# Altium PCB ArmRev2.PcbDoc
Units mil, origin at the board's own origin, x right, y up, seen from the top; angles counter-clockwise.
Board outline 3210 x 2675 mil, 2 copper layers (Top Layer, Bottom Layer); 82 components, 52 nets, 280 pads, 92 vias.
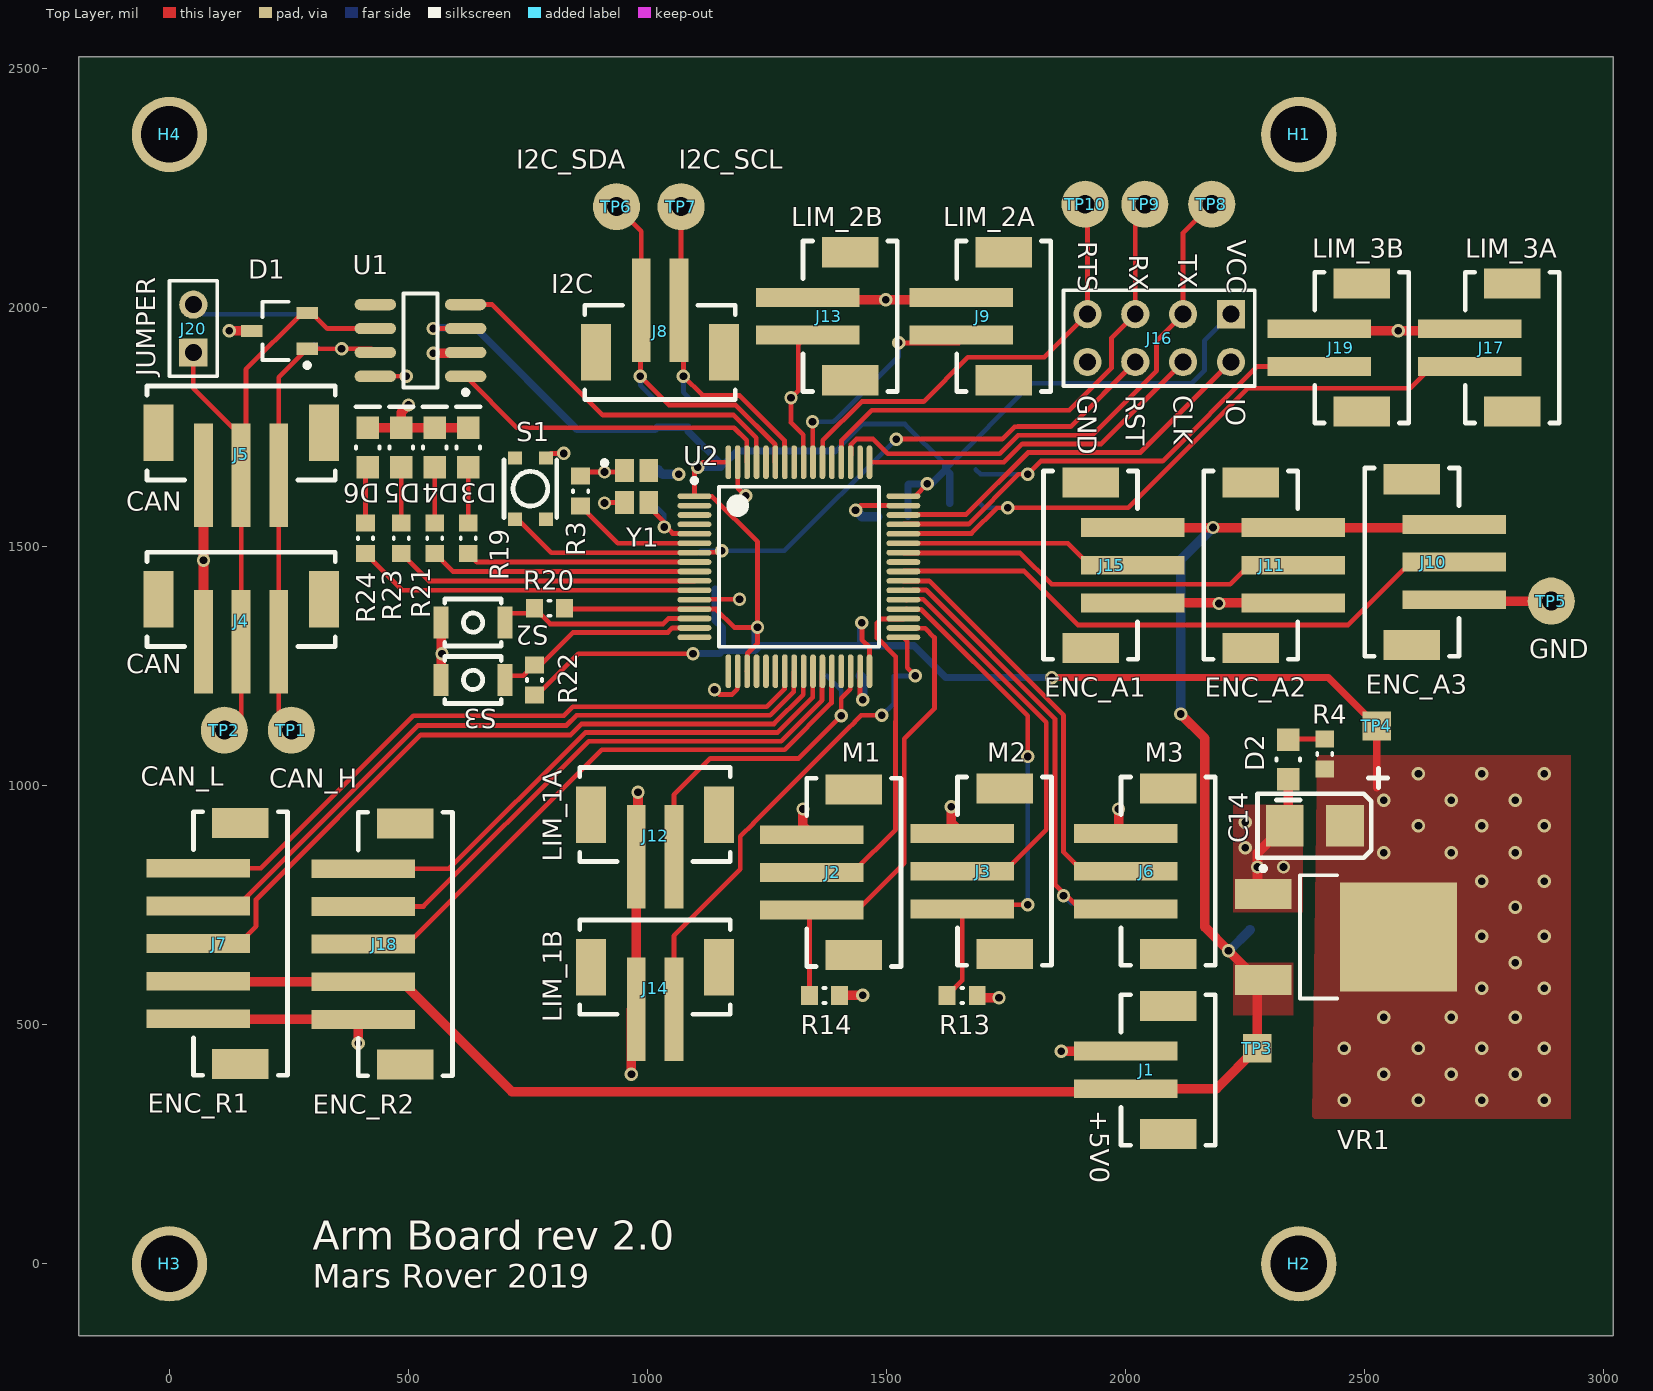
[diagram p0: Top Layer view]
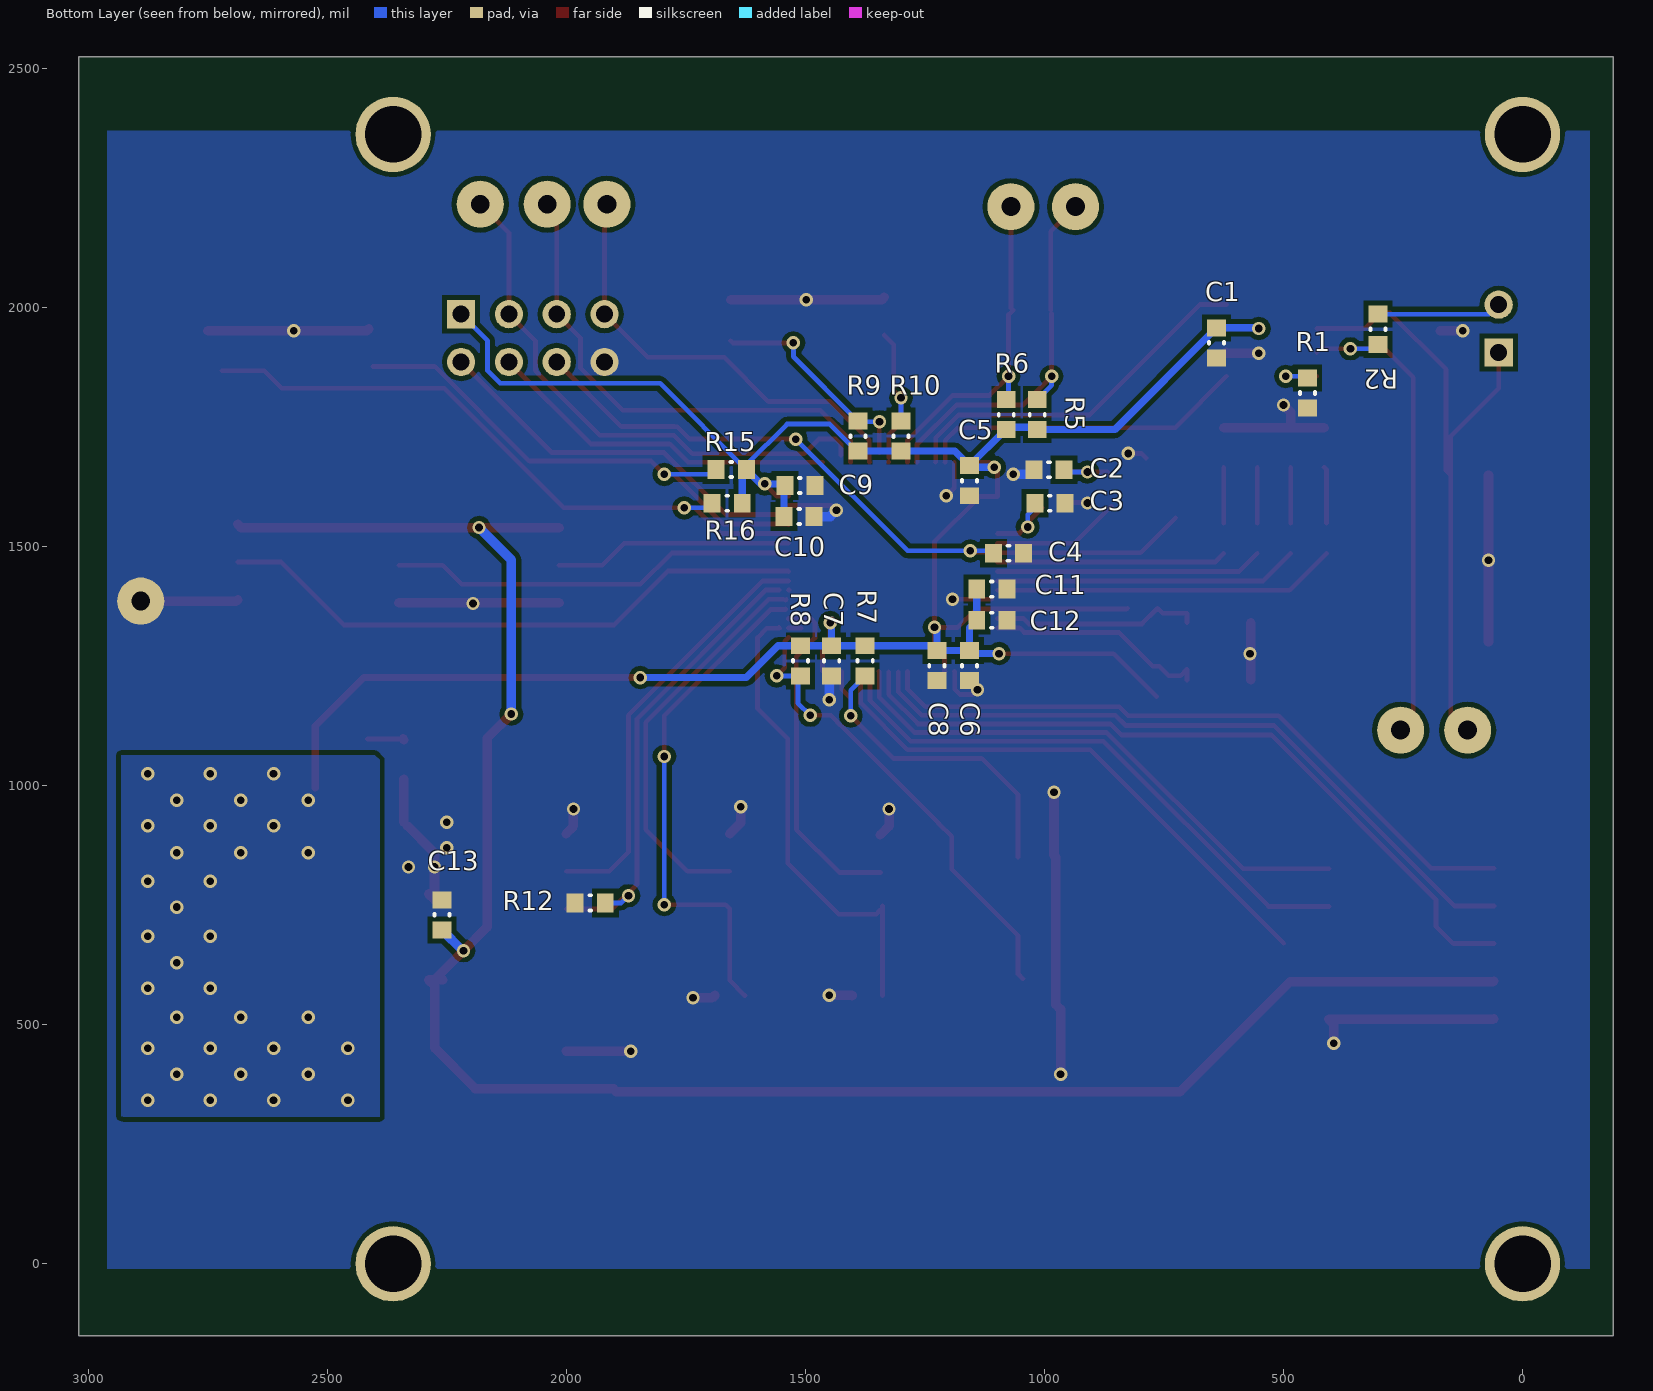
[diagram p1: Bottom Layer view, seen from below]

## Layer stack, top to bottom
Top Solder: solder mask 0.4, Solder Resist, Dk 3.5
Top Layer: signal copper 1.4
Dielectric 1: dielectric 12.6, FR-4, Dk 4.8
Bottom Layer: signal copper 1.4
Bottom Solder: solder mask 0.4, Solder Resist, Dk 3.5

## Board outline
-190,-150 3020,-150 3020,2525 -190,2525

## Design rules (kind name [scope] priority, off if disabled: settings)
Clearance Clearance_1 [All] p1: gap=10 ignorepadtopadclearanceinfootprint=TRUE except(0: Arc-Hole Track-Hole SMDPad-Hole THPad-Hole Via-Hole Fill-Hole Poly-Hole Region-Hole Text-Hole; 8: Arc-Arc Arc-Track Arc-SMDPad Track-Track Track-SMDPad)
HoleSize [All] p1: absolutevalues=TRUE maxlimit=137.8 minlimit=1 maxpercent=80.000 minpercent=20.000
PolygonConnect [All] p1: connectstyle=Direct reliefconductorwidth=10 reliefentries=4 polygonreliefangle="90 Angle" airgapwidth=10
RoutingVias [All] p1: holewidth=16 width=28 viastyle="Through Hole" minholewidth=16 minwidth=28 maxholewidth=28 maxwidth=50
SolderMaskExpansion [All] p1: expansion=4
Width [All] p1: maxlimit=20 minlimit=10 preferedwidth=10 minimp=50.000000 maximp=50.000000 favimp=50.000000
29 further rules are at their usual default settings.

## Classes and differential pairs
component class Support: D3 D4 D5 D6 R5 R6 R7 R8 R9 R10 R12 R13 R14 R15 R16 R19 R20 R21 R22 R23 R24 S2 S3 TP6 TP7 TP8 TP9 TP10
component class POWER: C13 C14 D2 R4 TP3 TP4 TP5 VR1
component class MCU: C2 C3 C4 C5 C6 C7 C8 C9 C10 C11 C12 H1 H2 H3 H4 R3 S1 U2 Y1
component class Connectors: J1 J2 J3 J4 J5 J6 J7 J8 J9 J10 J11 J12 J13 J14 J15 J16 J17 J18 J19
component class CAN: C1 D1 J20 R1 R2 TP1 TP2 U1

## Components (designator, comment, footprint, x,y, rotation, side; value= is the part's Value field where it differs from the comment)
C1 "CAP_0.1uF_16V_0603" CAPC0603(1608)55_N 640,1926.26 r90 bottom value=0.1uF
C2 "CAP_15pF_0603" CAPC0603(1608)55_N 990.51,1660.87 r180 bottom value=15pF
C3 "CAP_15pF_0603" CAPC0603(1608)55_N 988.5,1590.87 r0 bottom value=15pF
C4 "CAP_0.1uF_16V_0603" CAPC0603(1608)55_N 1075,1486.26 r0 bottom value=0.1uF
C5 "CAP_0.1uF_16V_0603" CAPC0603(1608)55_N 1156.5,1637.99 r90 bottom value=0.1uF
C6 "CAP_0.1uF_16V_0603" CAPC0603(1608)55_N 1156.5,1251.26 r90 bottom value=0.1uF
C7 "CAP_0.1uF_16V_0603" CAPC0603(1608)55_N 1445,1261.26 r90 bottom value=0.1uF
C8 "CAP_4.7uF_0603" CAPC0603(1608)55_N 1225,1251.26 r90 bottom value=4.7uF
C9 "CAP_0.1uF_16V_0603" CAPC0603(1608)55_N 1511.5,1627.99 r0 bottom value=0.1uF
C10 "CAP_0.1uF_16V_0603" CAPC0603(1608)55_N 1512.99,1562.99 r0 bottom value=0.1uF
C11 "CAP_10nF_0603" CAPC0603(1608)55_N 1110,1411.26 r0 bottom value=10nF
C12 "CAP_1uF_16V_0603" CAPC0603(1608)55_N 1110,1346.26 r0 bottom value=1uF
C13 "CAP_0.33uF_16V_0603" CAPC0603(1608)55_N 2260,730 r270 bottom value=0.33uF
C14 "CAP_10uF_0603_POL" AVX-CAPC3528_V 2395.51,916.26 r180 top value=10uF
D1 "TVS_DIODE_CAN" TVS_DIODE_CAN 230,1951.26 r180 top
D2 "DIO_LED_R" LED_0805_LINE 2340,1055 r270 top
D3 "DIO_LED_Y" LED_0805_LINE 625,1707.6 r90 top
D4 "DIO_LED_G" LED_0805_LINE 555,1707.6 r90 top
D5 "DIO_LED_G" LED_0805_LINE 485,1707.6 r90 top
D6 "DIO_LED_G" LED_0805_LINE 415,1707.6 r90 top
H1 "MOUNTING_HOLES" MOUNTING_HOLE#1 5260,-515 r0 top
H2 "MOUNTING_HOLES" MOUNTING_HOLE#2 77.2,702.2 r0 top
H3 "MOUNTING_HOLES" MOUNTING_HOLE#3 4845,-515 r0 top
H4 "MOUNTING_HOLES" MOUNTING_HOLE#4 77.2,702.2 r0 top
J1 "+5V0" JST-B2B-SM4-TB 2187.01,405.63 r90 top
J2 "M1" JST-B3B-SM4-TB 1530,818.86 r90 top
J3 "M2" JST-B3B-SM4-TB 1845,821.26 r90 top
J4 "CAN" JST-B3B-SM4-TB 150,1488.27 r180 top
J5 "CAN" JST-B3B-SM4-TB 150,1836.26 r180 top
J6 "M3" JST-B3B-SM4-TB 2187.01,821.26 r90 top
J7 "ENC_R1" JST-B5B-SM4-TB 247.01,670 r90 top
J8 "I2C" JST-B2B-SM4-TB 1026.14,1807.83 r0 top
J9 "LIM_2A" JST-B2B-SM4-TB 1843.43,1981.89 r90 top
J10 "ENC_A3" JST-B3B-SM4-TB 2500,1467.83 r270 top
J11 "ENC_A2" JST-B3B-SM4-TB 2162.99,1461.26 r270 top
J12 "LIM_1A" JST-B2B-SM4-TB 1015.63,1038.27 r180 top
J13 "LIM_2B" JST-B2B-SM4-TB 1522.01,1981.89 r90 top
J14 "LIM_1B" JST-B2B-SM4-TB 1015.63,719.1 r180 top
J15 "ENC_A1" JST-B3B-SM4-TB 1827.99,1461.26 r270 top
J16 "HEADER 4X2" HEADER_2X4 2220,1986.26 r180 top
J17 "LIM_3A" JST-B2B-SM4-TB 2907.01,1916.26 r90 top
J18 "ENC_R2" JST-B5B-SM4-TB 592.01,668.78 r90 top
J19 "LIM_3B" JST-B2B-SM4-TB 2592.01,1916.26 r90 top
J20 "JUMPER" HDR1X2 50,1906.26 r90 top
R1 "RES_0R_0603" RESC0603(1608)_N 450,1821.26 r270 bottom value=0R
R2 "RES_120R_0603" RESC0603(1608)_N 302.4,1954.76 r90 bottom value=120R
R3 "RES_0R_0603" RESC0603(1608)_N 860,1616.26 r90 top value=0R
R4 "RES_100R_0603" RESC0603(1608)_N 2416.26,1066.26 r270 top value=100R
R5 "RES_4K7_0603" RESC0603(1608)_N 1015,1776.26 r270 bottom value=4K7
R6 "RES_4K7_0603" RESC0603(1608)_N 1080,1776.26 r270 bottom value=4K7
R7 "RES_10K_0603" RESC0603(1608)_N 1375,1261.26 r90 bottom value=10K
R8 "RES_10K_0603" RESC0603(1608)_N 1510,1261.26 r90 bottom value=10K
R9 "RES_10K_0603" RESC0603(1608)_N 1390,1731.26 r270 bottom value=10K
R10 "RES_10K_0603" RESC0603(1608)_N 1300,1731.26 r270 bottom value=10K
R12 "RES_10K_0603" RESC0603(1608)_N 1950,755 r180 bottom value=10K
R13 "RES_10K_0603" RESC0603(1608)_N 1657.99,561.26 r180 top value=10K
R14 "RES_10K_0603" RESC0603(1608)_N 1370,561.26 r180 top value=10K
R15 "RES_10K_0603" RESC0603(1608)_N 1655,1661.26 r180 bottom value=10K
R16 "RES_10K_0603" RESC0603(1608)_N 1663.5,1590.87 r180 bottom value=10K
R19 "RES_100R_0603" RESC0603(1608)_N 625,1517.6 r90 top value=100R
R20 "RES_10K_0603" RESC0603(1608)_N 795,1371.26 r0 top value=10K
R21 "RES_100R_0603" RESC0603(1608)_N 555,1517.6 r90 top value=100R
R22 "RES_10K_0603" RESC0603(1608)_N 763.5,1221.26 r90 top value=10K
R23 "RES_100R_0603" RESC0603(1608)_N 485,1517.6 r90 top value=100R
R24 "RES_100R_0603" RESC0603(1608)_N 410,1517.6 r90 top value=100R
S1 "SW_PWR" PTS830GM140 755,1621.26 r270 top
S2 "SW_TACTILE" B3U-1100P 635,1341.26 r180 top
S3 "SW_TACTILE" B3U-1100P 635,1221.26 r180 top
TP1 "CAN_H" TESTPOINT_LOOP 255,1116.26 r180 top
TP2 "CAN_L" TESTPOINT_LOOP 115,1116.26 r180 top
TP3 "+5V0" TESTPOINT 2275,451.26 r0 bottom
TP4 "+3V3" TESTPOINT 2525,1125 r0 bottom
TP5 "GND" TESTPOINT_LOOP 2890,1386.26 r270 top
TP6 "I2C_SDA" TESTPOINT_LOOP 935,2211.26 r0 top
TP7 "I2C_SCL" TESTPOINT_LOOP 1070,2211.26 r0 top
TP8 "UART_TX" TESTPOINT_LOOP 2180,2216.26 r0 top
TP9 "UART_RX" TESTPOINT_LOOP 2040,2216.26 r0 top
TP10 "UART_RTS" TESTPOINT_LOOP 1915,2216.26 r90 top
U1 "IC TXRX CAN" LT-S8_N 525,1931.26 r180 top
U2 "STM32F091RC" STM_LQFP64_N 1316.5,1457.99 r0 top
VR1 "5V0_3V3_LDO" VOLTAGE_REGULATOR 2397.68,683.86 r270 top
Y1 "CRYSTAL_32MHZ" AVX-CX2520DB32000D0GEJZ1-4_V 977.01,1625.87 r0 top

## Footprints (in the part's own frame and the unit in brackets; to place one, negate y for a bottom-side part, rotate by r counter-clockwise, add the part's x,y. Pads: shape width x height; smd on the part's side, far side on the other; paste and mask are expansions set on the pad)
AVX-CAPC3528_V [mm] "SMT Capacitor, 2 Leads, Body 3.5x2.8mm"
  rect 2x2.2 smd: 1(-1.6,0) 2(1.6,0)
  silkscreen extent -3.87,-3.05 3.05,1.7, body extent -1.79,-1.54 1.8,1.54, height 1.9
AVX-CX2520DB32000D0GEJZ1-4_V [mm] "Hand Drawn, 4-Leads,Body 2.5x2mm"
  rect 1x1.2 smd: 1(-0.65,0.85) 2(-0.65,-0.85) 3(0.65,-0.85) 4(0.65,0.85)
  silkscreen extent -1.82,1.13 -1.58,1.38, body extent -1,-1.25 1,1.25, height 0.55
B3U-1100P [mm] "TACTILE SWITCH GREY"
  rect 0.8x1.7 smd: 1(-1.7,0) 2(1.7,0)
  silkscreen extent -1.5,-1.25 1.5,1.25
CAPC0603(1608)55_N [mm] "Chip Capacitor, Body 1.6x0.8mm, Height 0.55mm, IPC Medium Density"
  rect 0.9x1 smd: 1(-0.8,0) 2(0.8,0)
  silkscreen extent -0.05,-0.4 0.05,0.4, body extent -0.87,-0.48 0.88,0.47, height 0.55
HDR1X2 [mm] "Connector; Header; 2 Position"
  rect 1.5x1.5 hole 0.9: 1(0,0)
  round 1.5 hole 0.9: 2(2.54,0)
  silkscreen extent -1.27,-1.27 3.81,1.27
HEADER_2X4 [mm]
  rect 1.5x1.5 hole 0.9: 1(0,0)
  round 1.5 hole 0.9: 2(2.54,0) 3(5.08,0) 4(7.62,0) 5(0,2.54) 6(2.54,2.54) 7(5.08,2.54) 8(7.62,2.54)
  silkscreen extent -1.27,-1.27 8.89,3.81
JST-B2B-SM4-TB [mm]
  rect 1x5.5 smd: 1(-1,4.75) 2(1,4.75)
  rect 1.6x3 smd: 3(-3.4,2.5) 4(3.4,2.5)
  silkscreen extent -4,0 4,5
JST-B3B-SM4-TB [mm]
  rect 1x5.5 smd: 1(-2,4.75) 2(0,4.75) 3(2,4.75)
  rect 1.6x3 smd: 4(-4.4,2.5) 5(4.4,2.5)
  silkscreen extent -5,0 5,5
JST-B5B-SM4-TB [mm]
  rect 1x5.5 smd: 1(-4,4.75) 2(-2,4.75) 3(0,4.75) 4(2,4.75) 5(4,4.75)
  rect 1.6x3 smd: 6(-6.4,2.5) 7(6.4,2.5)
  silkscreen extent -7,0 7,5
LED_0805_LINE [mm] "SMD, 2-Leads, Body 2x1.25mm"
  rect 1.2x1.2 smd: 1(-1.05,0) 2(1.05,0)
  silkscreen extent -0.05,-0.63 2.16,0.64, body extent -1,-0.63 1,0.63, height 0.8
LT-S8_N [mm] "SOP, 8-Leads, Body 4.9x3.9mm, Pitch 1.27mm, IPC Medium Density"
  oval 2.2x0.6 smd: 1(-2.4,1.905) 2(-2.4,0.635) 3(-2.4,-0.635) 4(-2.4,-1.905) 5(2.4,-1.905) 6(2.4,-0.635) 7(2.4,0.635) 8(2.4,1.905)
  silkscreen extent -2.53,-2.5 0.9,2.88, body extent -2,-2.5 2,2.5, height 1.76
MOUNTING_HOLE#1 [mm]
  round 4 hole 3 unplated: 0(-73.604,73.081)
MOUNTING_HOLE#2 [mm]
  round 4 hole 3 unplated: 0(58.039,-17.836)
MOUNTING_HOLE#3 [mm]
  round 4 hole 3 unplated: 0(-123.063,13.081)
MOUNTING_HOLE#4 [mm]
  round 4 hole 3 unplated: 0(-1.961,42.164)
PTS830GM140 [mm] "PWR TACTILE SWITCH (RED)"
  rect 0.7x0.75 smd: 1(-1.625,0.825) 2(1.625,0.825) 3(-1.625,-0.825) 4(1.625,-0.825)
  silkscreen extent -1.53,-1.4 1.53,1.4
RESC0603(1608)_N [mm] "Chip Resistor, Body 1.6x0.8mm, IPC Medium Density"
  rect 0.9x1 smd: 1(-0.8,0) 2(0.8,0)
  silkscreen extent -0.05,-0.4 0.05,0.4, body extent -0.85,-0.47 0.85,0.47, height 0.6
STM_LQFP64_N [mm] "Thin QFP, 64-Leads, Body 10x10mm, Pitch 0.5mm, IPC Medium Density"
  oval 1.8x0.3 smd mask+0.05: 1(-5.55,3.75) 2(-5.55,3.25) 3(-5.55,2.75) 4(-5.55,2.25) 5(-5.55,1.75) 6(-5.55,1.25) 7(-5.55,0.75) 8(-5.55,0.25) 9(-5.55,-0.25) 10(-5.55,-0.75) 11(-5.55,-1.25) 12(-5.55,-1.75) 13(-5.55,-2.25) 14(-5.55,-2.75) 15(-5.55,-3.25) 16(-5.55,-3.75) 33(5.55,-3.75) 34(5.55,-3.25) 35(5.55,-2.75) 36(5.55,-2.25) 37(5.55,-1.75) 38(5.55,-1.25) 39(5.55,-0.75) 40(5.55,-0.25) 41(5.55,0.25) 42(5.55,0.75) 43(5.55,1.25) 44(5.55,1.75) 45(5.55,2.25) 46(5.55,2.75) 47(5.55,3.25) 48(5.55,3.75)
  oval 0.3x1.8 smd mask+0.05: 17(-3.75,-5.55) 18(-3.25,-5.55) 19(-2.75,-5.55) 20(-2.25,-5.55) 21(-1.75,-5.55) 22(-1.25,-5.55) 23(-0.75,-5.55) 24(-0.25,-5.55) 25(0.25,-5.55) 26(0.75,-5.55) 27(1.25,-5.55) 28(1.75,-5.55) 29(2.25,-5.55) 30(2.75,-5.55) 31(3.25,-5.55) 32(3.75,-5.55) 49(3.75,5.55) 50(3.25,5.55) 51(2.75,5.55) 52(2.25,5.55) 53(1.75,5.55) 54(1.25,5.55) 55(0.75,5.55) 56(0.25,5.55) 57(-0.25,5.55) 58(-0.75,5.55) 59(-1.25,5.55) 60(-1.75,5.55) 61(-2.25,5.55) 62(-2.75,5.55) 63(-3.25,5.55) 64(-3.75,5.55)
  silkscreen extent -5.67,-4.25 4.25,4.7, body extent -5,-5 5,5, height 1.6
TESTPOINT [mil]
  rect 60x60 smd far side: 1(0,0)
TESTPOINT_LOOP [mm]
  round 2.5 hole 1: 1(0,0)
TVS_DIODE_CAN [mm] "SOT23, 3-Leads, Body 2.95x2.80mm, Pitch 0.95mm, IPC Low Density"
  rect 1.15x0.65 smd: 1(-1.475,0.95) 2(-1.475,-0.95) 3(1.475,0)
  silkscreen extent -1.6,-1.55 0.9,1.95, body extent -1.5,-1.55 1.5,1.55, height 1.25
VOLTAGE_REGULATOR [mm] "DPAK, 3-Leads, Body 6.095x6.54mm, Pitch 4.57mm"
  rect 1.6x3 smd: 1(-2.285,-2.79) 3(2.285,-2.79)
  rect 5.8x6.2 smd: 2(0,4.39)
  silkscreen extent -3.76,-2.91 3.27,1.14, body extent -3.27,-0.84 3.27,5.25, height 2.38

## Part data
C1 C4 C5 C6 C7 C9 C10: "CAP CER 0.1UF 16V X7R 0603", Digikey Part Number=311-1088-1-ND, Manufacturer=Yageo, MPN=CC0603KRX7R7BB104, Package="0603 (1608 Metric)", Temperature Coefficient=X7R, Voltage Rating=16V, Dimensions="0.063\" L x 0.031\" W (1.60mm x 0.80mm)"
C2 C3: "CAP CER 15PF 250V NPO 0603", Digikey Part Number=311-3282-1-ND, Manufacturer=Yageo, MPN=AC0603JRNPOYBN150, Package="0603 (1608 Metric)", Temperature Coefficient=NP0, Voltage Rating=250v, Dimensions="0.063\" L x 0.031\" W (1.60mm x 0.80mm)"
C8: "CAP CER 4.7UF 6.3V X5R 0603", Digikey Part Number=311-1521-1-ND, Manufacturer=Yageo, MPN=CC0603KRX5R5BB475, Package="0603 (1608 Metric)", Temperature Coefficient=X5R, Voltage Rating=6.3V, Dimensions="0.063\" L x 0.031\" W (1.60mm x 0.80mm)"
C11: "CAP CER 10000PF 16V X7R 0603", Digikey Part Number=311-3369-1-ND, Manufacturer=Yageo, MPN=CC0603KRX7R7BB103, Package="0603 (1608 Metric)", Temperature Coefficient=X7R, Voltage Rating=16V, Dimensions="0.063\" L x 0.031\" W (1.60mm x 0.80mm)"
C12: "CAP CER 1UF 16V Y5V 0603", Digikey Part Number=311-1372-1-ND, Manufacturer=Yageo, MPN=CC0603ZRY5V7BB105, Package="0603 (1608 Metric)", Temperature Coefficient=Y5V, Voltage Rating=16V, Dimensions="0.063\" L x 0.031\" W (1.60mm x 0.80mm)"
C13: "CAP CER 0.33UF 16V X7R 0603", Digikey Part Number=490-6050-1-ND, Manufacturer="Murata Electronics North America", MPN=GCM188R71C334KA37D, Package="0603 (1608 Metric)", Temperature Coefficient=X7R, Voltage Rating=16V, Dimensions="0.063\" L x 0.031\" W (1.60mm x 0.80mm)"
C14: "Capacitor, Tantalum, 10uF 10% 20V MCCT-B (3528)", Digikey Part Number=311-1817-1-ND, Manufacturer=Yageo, MPN=CC0603MRX5R6BB106, Package="0603 (1608 Metric)", Temperature Coefficient=X5R, Voltage Rating=10V, Dimensions="0.063\" L x 0.031\" W (1.60mm x 0.80mm)"
D1: "TVS DIODE 24V 41V SOT323-3", Digikey Part Number=1727-3891-1-ND, Manufacturer="Nexperia USA Inc.", MPN=PESD2CAN,215, Package="SC-70, SOT-323", ComponentLink1Description=Datasheet, ComponentLink1URL=https://assets.nexperia.com/documents/data-sheet/PESD1CAN-U.pdf
D2: "LED RED DIFFUSED 0805 SMD", Digikey Part Number=475-1278-1-ND, Forward Voltage Drop=2V, Manufacturer=OSRAM, MPN="LS R976-NR-1", Package="0805 (2012 Metric)"
D3: "LED YELLOW DIFFUSED 0805 SMD", Digikey Part Number=475-2560-1-ND, Forward Voltage Drop=2.2V, Manufacturer=OSRAM, MPN="LY R976-PS-36", Package="0805 (2012 Metric)"
D4 D5 D6: "LED GREEN DIFFUSED 0805 SMD", Digikey Part Number=475-1410-1-ND, Forward Voltage Drop=2.2V, Manufacturer=OSRAM, MPN="LG R971-KN-1", Package="0805 (2012 Metric)"
H1 H2 H3 H4: "6cm x 6cm"
J1 J8 J9 J12 J13 J14 J17 J19: library part CON_2M_PH_TOP_SMT, "CONN HEADER PH TOP 2POS 2MM SMD", Digikey Part Number=455-1734-1-ND, Manufacturer=JST, MPN=B2B-PH-SM4-TB, ComponentLink1Description=Datasheet, ComponentLink1URL=http://www.jst-mfg.com/product/pdf/eng/ePH.pdf
J2 J3 J4 J5 J6 J10 J11 J15: library part CON_3M_PH_TOP_SMT, "CONN HEADER PH TOP 3POS 2MM SMD", Digikey Part Number=455-1735-1-ND, Manufacturer=JST, MPN=B3B-PH-SM4-TB(LF)(SN), ComponentLink1Description=Datasheet, ComponentLink1URL=http://www.jst-mfg.com/product/pdf/eng/ePH.pdf
J7 J18: library part CON_5M_PH_TOP_SMT, "CONN HEADER PH TOP 5POS 2MM SMD", Digikey Part Number=455-1737-1-ND, Manufacturer=JST, MPN=B5B-PH-SM4-TB(LF)(SN), ComponentLink1Description=Datasheet, ComponentLink1URL=http://www.jst-mfg.com/product/pdf/eng/ePH.pdf
J16: "Header, 4-Pin Dual row", Digikey Part Number=S9015E-04-ND, Manufacturer="Sullins Connector Solutions", MPN=GRPB042VWVN-RC
J20: library part JUMPER_2, "HEADER 2X1"
R1 R3: "RES SMD 0 OHM JUMPER 1/10W 0603", Digikey Part Number=311-0.0GRCT-ND, Manufacturer=Yageo, MPN=RC0603JR-070RL, Package="0603 (1608 Metric)", Dimensions="0.063\" L x 0.031\" W (1.60mm x 0.80mm)"
R2: "RES SMD 120 OHM 5% 1/10W 0603", Digikey Part Number=311-120GRCT-ND, Manufacturer=Yageo, MPN=RC0603JR-07120RL, Package="0603 (1608 Metric)", Tolerance=5%, Dimensions="0.063\" L x 0.031\" W (1.60mm x 0.80mm)"
R4 R19 R21 R23 R24: "RES SMD 100 OHM 1% 1/10W 0603", Digikey Part Number=311-100HRCT-ND, Manufacturer=Yageo, MPN=RC0603FR-07100RL, Package="0603 (1608 Metric)", Tolerance=1%, Dimensions="0.063\" L x 0.031\" W (1.60mm x 0.80mm)"
R5 R6: "RES SMD 4.7K OHM 5% 1/10W 0603", Digikey Part Number=311-4.7KGRCT-ND, Manufacturer=Yageo, MPN=RC0603JR-074K7L, Package="0603 (1608 Metric)", Tolerance=5%, Dimensions="0.063\" L x 0.031\" W (1.60mm x 0.80mm)"
R7 R8 R9 R10 R12 R13 R14 R15 R16 R20 R22: "RES SMD 10K OHM 5% 1/10W 0603", Digikey Part Number=311-10KGRCT-ND, Manufacturer=Yageo, MPN=RC0603JR-0710KL, Package="0603 (1608 Metric)", Tolerance=5%, Dimensions="0.063\" L x 0.031\" W (1.60mm x 0.80mm)"
S1: "Power Switch (Red)", Digikey Part Number=CKN10587CT-ND, Manufacturer=C&K, MPN="PTS830GM140 SMTR LFS", ComponentLink1Description=Datasheet, ComponentLink1URL=https://www.ckswitches.com/media/1478/pts830.pdf
S2 S3: "Tactile Switch (Grey)", Digikey Part Number=SW1021TR-ND, Manufacturer="Omron Electronics Inc-EMC Div", MPN=B3U-1100P
TP1 TP2 TP5 TP6 TP7 TP8 TP9 TP10: library part TESTPOINT_LOOP, "PC TEST POINT MINIATURE WHITE", Digikey Part Number=36-5002-ND, Manufacturer="Keystone Electronics", MPN=5002
TP3 TP4: library part TESTPOINT_SMD
U1: library part LTC2875, "IC TXRX CAN 4MBPS 8SO", Digikey Part Number=LTC2875IS8#PBF-ND, Manufacturer="Linear Technologies", MPN=LTC2875IS8#PBF, Package="8-SOIC (0.154\", 3.90mm Width)", ComponentLink1Description=Datasheet, ComponentLink1URL=https://www.analog.com/media/en/technical-documentation/data-sheets/2875f.pdf
U2: Digikey Part Number=497-15167-ND, Manufacturer=STMicroelectronics, Package=64-LQFP, ComponentLink1Description=Datasheet, ComponentLink1URL=https://www.st.com/content/ccc/resource/technical/document/datasheet/95/3c/2e/5b/21/09/45/a6/DM00115237.pdf/files/DM00115237.pdf/jcr:content/translations/en.DM00115237.pdf#%5B%7B%22num%22%3A96%2C%22gen%22%3A0%7D%2C%7B%22name%22%3A%22XYZ%22%7D%2C67%2C755%2Cnull%5D, MPN=STM32F091RC
VR1: "IC REG LINEAR 3.3V 1A DPAK", Current Output=1A, Digikey Part Number=NCP1117DT33T5GOSCT-ND, Manufacturer="ON Semiconductor", MPN=NCP1117DT33T5G
Y1: "CRYSTAL 32MHZ 8PF SMD", Digikey Part Number=1253-1730-1-ND, Manufacturer="Kyocera International Inc. Electronic Components", MPN=CX2520DB32000D0GPSC1, Package="4-SMD, No Lead", Dimensions="0.098\" L x 0.079\" W (2.50mm x 2.00mm)"

## Via types
v1: diameter 28, hole 16, Top Layer to Bottom Layer, tented both sides, 92 vias

## Nets (pads, with @x,y where several pads share a name; then routed paths per layer and width w, separated by ;. In a path a pad name is that pad's centre, name@x,y a point inside that pad or via, vN(x,y) a via of type N, cw(c..) or ccw(c..) an arc to the next point about the centre after c; other vN are vias at no path point)
+3V3: C1.2 C5.2 C6.2 C7.2 C8.2 C9.2 C10.2 C11.2 C12.2 C14.1 J16.1 R4.2 R5.2 R6.2 R7.2 R8.2 R9.2 R10.2 R15.2 R16.2 R20.2 R22.1 TP4.1 U1.3 U2.1 U2.13 U2.19 U2.32 U2.48 U2.64 VR1.2 | length 5815.1
  Top Layer w10: v1(551.57,1956.26) U1.3 ; R22.1@765,1186.26 855,1276.26 v1(1095,1276.26) ; R20.2 828.35,1369.41 U2.13 1142.94,1369.41 1181.09,1331.26 v1(1230,1331.26) ; U2.64 1115.24,1676.5 v1(1105,1666.26) 1097.99,1659.25 U2.1 1097.99,1604.85 1135.35,1604.85 1230,1510.2 v1(1230,1331.26) ; U2.19 1209.01,1240.27 1209.01,1276.85 1230,1297.84 v1(1230,1331.26) ; v1(1448.27,1341.26) 1448.27,1305.81 1464.13,1289.95 U2.32 ; U2.48 1559.37,1605.63 v1(1585,1631.26)
  Top Layer w15: v1(1845,1226.26) 2423.74,1226.26 TP4.1 2525,995
  Bottom Layer w10: R9.2@1392.13,1699.76 1448.87,1756.5 1538.26,1756.5 R15.2@1623.5,1671.26 ; R15.2 1803.98,1841.73 2138.44,1841.73 2164.53,1867.82 2164.53,1930.79 J16.1
  Bottom Layer w15: v1(551.57,1956.26) 553.07,1957.76 C1.2 852.99,1744.76 R5.2 1020,1749.76 1085,1749.76 1085,1740.98 C5.2 ; v1(1095,1276.26) 1150,1276.26 C6.2 ; v1(1105,1666.26) 1153.27,1666.26 C5.2 ; C11.2 C12.2 1156.5,1331.26 C6.2 ; v1(1230,1331.26) 1225,1326.26 C8.2 ; R9.2@1392.13,1699.76 R9.2 R10.2 1186.77,1699.76 C5.2 ; v1(1448.27,1341.26) 1445,1337.99 C7.2 ; C10.2 1544.49,1629.49 1546.26,1631.26 v1(1585,1631.26) 1593.5,1631.26 R15.2 ; R15.2@1623.5,1671.26 R15.2 ; R16.2 1632.01,1652.76 R15.2 ; v1(1845,1226.26) 1623.74,1226.26 1557.24,1292.76 R8.2 C7.2 ; C6.2 C8.2 ; C8.2 1235,1292.76 R7.2 C7.2
  other v1: 2456.69,342.52 2612.2,342.52 2744.69,342.52 2875,342.52 2539.37,396.26 2681.1,396.26 2814.96,396.26 2456.69,451.26 2612.2,451.26 2744.69,451.26 2875,451.26 2539.37,516.02 2681.1,516.02 2814.96,516.02 2744.69,576.26 2875,576.26 2814.96,630 2744.69,685 2875,685 2814.96,746.26 2744.69,800 2875,800 2540,860 2681.1,860 2814.96,860 2612.2,916.26 2744.69,916.26 2875,916.26 2540,970 2681.1,970 2814.96,970 2612.2,1025 2744.69,1025 2875,1025
+5V0: C13.2 J1.1 J7.2 J10.1 J11.1 J15.1 J18.2 TP3.1 VR1.3 | length 4304
  Top Layer w20: J7.2 61.22,590.04 J18.2 486.22,590.04 716.26,360 1895,360 1901.26,366.26 J1.1 2190,366.26 TP3.1 2275,581.06 VR1.3 VR1.3@2276.1,593.9 ; J15.1 v1(2182.5,1540) J11.1 2680.44,1540 J10.1 ; v1(2115,1150) 2165.64,1099.36 2165.64,704.36 v1(2215,655) VR1.3@2276.1,593.9 ; VR1.3@2258.9,593.9 VR1.3@2276.1,593.9
  Bottom Layer w20: v1(2115,1150) 2115,1472.5 v1(2182.5,1540) ; v1(2215,655) 2216.5,655 C13.2
BUTTON_1: R20.1 S2.1 U2.14 | length 438
  Top Layer w10: S2.1 701.93,1360.56 752.8,1360.56 R20.1 796.19,1338.57 1032.31,1338.57 1043.46,1349.72 U2.14
BUTTON_2: R22.2 S3.1 U2.15 | length 464.9
  Top Layer w10: S3.1 701.93,1243.19 715.12,1230 739.73,1230 759.73,1250 773.74,1250 844.31,1320.57 1042.54,1320.57 1052.01,1330.04 U2.15
GND: C1.1 C2.1 C3.1 C4.1 C5.1 C6.1 C7.1 C8.1 C9.1 C10.1 C11.1 C12.1 C13.1 C14.2 D1.3 D2.2 D3.2 D4.2 D5.2 D6.2 J1.2 J2.3 J3.3 J4.3 J5.3 J6.3 J7.1 J9.2 J10.3 J11.3 J12.2 J13.2 J14.2 J15.3 J16.8 J17.2 J18.1 J19.2 R1.2 R12.1 R13.1 R14.1 S1.1 S2.2 S3.2 TP5.1 U1.2 U2.12 U2.18 U2.31 U2.47 U2.63 VR1.1 Y1.2 | length 4404.6
  Top Layer w10: U1.2 U1.2@620.98,1904.76 ; S1.1 797.24,1695 v1(825,1695) ; v1(910,1591.26) 911.14,1592.4 Y1.2 ; U2.12@1110.03,1389.84 v1(1192.15,1389.84) ; v1(1140,1201.05) 1150,1191.05 1176.69,1191.05 1187.76,1202.13 1187.76,1238.71 U2.18 ; U2.63 1188.54,1622.72 v1(1205,1606.26) ; v1(1435,1576.26) 1444.68,1585.94 U2.47 ; U2.31 1444.45,1185.55 v1(1450,1180) ; C14.2 C14.2@2340,923.74
  Top Layer w20: J7.1 61.22,511.3 J18.1 J18.1 395,501.22 v1(395,461.26) ; J4.3 v1(71.26,1471.26) J5.3 ; v1(125,1951.26) D1.3 ; D6.2 D5.2 ; v1(500,1796.26) 485,1781.26 D5.2 ; v1(551.57,1904.76) 617.99,1904.76 U1.2 ; S3.2 S2.2 ; D3.2 D4.2 D5.2 ; v1(966.26,396.26) 966.26,532.09 976.26,542.09 J12.2 980,855 v1(980,986.26) ; v1(1325,951.26) 1325,915.59 J2.3 ; J13.2 1340,2016.26 v1(1498.21,2016.26) J9.2@1656.42,2016.26 ; R14.1 1402.32,562.09 v1(1450,562.09) ; v1(1635,956.26) 1635,922.99 J3.3 ; R13.1 1694.49,556.26 v1(1735,556.26) ; v1(1865,445) J1.2 ; v1(1985,951.26) 1985,915 J6.3 ; J15.3 J11.3 ; VR1.1@2275,760.98 VR1.1 ; VR1.1@2275.67,773.82 2275.67,859.41 C14.2 ; C14.2@2340,923.74 D2.2 ; J19.2@2412.99,1955.63 2417.36,1951.26 v1(2570,1951.26) J17.2@2750,1951.26 ; J10.3 2689.84,1386.26 TP5.1
  Bottom Layer w10: C3.1@956.61,1591.26 C3.1
  Bottom Layer w20: C2.1 1031.61,1651.26 v1(1065,1651.26) ; v1(1435,1576.26) 1448.27,1562.99 C10.1 ; C7.1 1455,1219.76 1450,1214.76 v1(1450,1180)
  other v1: 2275.67,830 2330,830 2250,870 2250,923.74 570,1276.26 2195,1381.26
I2C_SCL: J8.2 R6.1 TP7.1 U2.58 | length 721.2
  Top Layer w10: TP7.1 1070,1999.33 J8.2 1075,1985.35 v1(1075,1856.26) 1115,1816.26 1192.15,1816.26 1286.19,1722.23 1286.19,1677.28 U2.58
  Bottom Layer w10: v1(1075,1856.26) 1075,1822.76 R6.1@1085,1812.76
I2C_SDA: J8.1 R5.1 TP6.1 U2.59 | length 808.6
  Top Layer w10: TP6.1 986.77,2159.49 J8.1 ; J8.1@985,1987.64 v1(985,1856.26) 1045,1796.26 1184.54,1796.26 1266.5,1714.3 1266.5,1677.28 U2.59
  Bottom Layer w10: v1(985,1856.26) 985,1837.76 R5.1
LED_1: R19.1 U2.8 | length 480.6
  Top Layer w10: R19.1 643.27,1467.83 U2.8
LED_2: R21.1 U2.9 | length 558.7
  Top Layer w10: R21.1 592.95,1448.15 U2.9
LED_3: R23.1 U2.10 | length 636.9
  Top Layer w10: R23.1 542.64,1428.46 U2.10
LED_4: R24.1 U2.11 | length 720
  Top Layer w10: R24.1 487.32,1408.78 U2.11
LIM_1A: J12.1 R7.1 U2.30 | length 745.7
  Top Layer w10: J12.1 1055,981.26 1130.98,1057.24 1315.98,1057.24 v1(1405,1146.26) 1405,1183.15 1423.98,1202.13 1423.98,1238.71 U2.30
  Bottom Layer w10: R7.1 1405,1199.76 v1(1405,1146.26)
LIM_1B: J14.1 R8.1 U2.33 | length 989.7
  Top Layer w10: J14.1@1045,596.26 1055,606.26 1055,686.26 1193.99,825.24 1193.99,894.23 1221.72,921.97 1221.72,922.67 1416.31,1117.26 1417.01,1117.26 1434,1134.25 1434,1134.95 1446.41,1147.36 v1(1490,1147.36) ; U2.33 1543,1302.35 1543,1246.76 v1(1560,1229.76)
  Bottom Layer w10: v1(1490,1147.36) 1515.64,1172.99 1515.64,1229.76 v1(1560,1229.76)
LIM_2A: J9.1 R9.1 U2.55 | length 463.4
  Top Layer w10: v1(1345,1761.26) 1345.24,1761.02 U2.55@1345.24,1696.26 ; v1(1525,1926.26) 1651.93,1926.26 J9.1@1656.42,1930.75
  Bottom Layer w10: v1(1345,1761.26) 1388.5,1761.26 R9.1 1525,1897.76 v1(1525,1926.26)
LIM_2B: J13.1 R10.1 U2.56 | length 331
  Top Layer w10: U2.56@1325.56,1677.28 U2.56 ; U2.56@1325.56,1686.26 1325.56,1733.87 1300,1759.43 v1(1300,1811.26) 1315,1826.26 1315,1922.52 J13.1
  Bottom Layer w10: R10.1 v1(1300,1811.26)
LIM_3A: J17.1 R16.1 U2.44 | length 1388.7
  Top Layer w10: U2.44 1535.78,1527.67 1677.39,1527.67 1730.99,1581.26 v1(1753.5,1581.26) 2005.12,1581.26 2255.12,1831.26 2595,1831.26 2631.56,1867.82 J17.1@2720,1867.82
  Bottom Layer w10: R16.1 1704.61,1581.26 v1(1753.5,1581.26)
LIM_3B: J19.1 R15.1 U2.45 | length 1119.5
  Top Layer w10: U2.45 1535.78,1547.35 1671.62,1547.35 1775.53,1651.26 v1(1795,1651.26) 1822.73,1678.98 2077.1,1678.98 2275,1876.89 J19.1
  Bottom Layer w10: R15.1 1696.5,1651.26 v1(1795,1651.26)
NetC2_2: C2.2 R3.2 Y1.1 | length 147.1
  Top Layer w10: R3.2 868.5,1656.26 v1(910,1656.26) 948.35,1656.26 Y1.1
  Bottom Layer w10: v1(910,1656.26) 954.41,1656.26 C2.2
NetC3_2: C3.2 U2.5 Y1.3 | length 161.5
  Top Layer w10: Y1.3@1005,1581.26 1035,1551.26 v1(1035,1541.26) 1038.67,1541.26 1052.26,1527.67 1097.53,1527.67 U2.5@1097.99,1527.2
  Bottom Layer w10: C3.2@1022.4,1579.72 1035,1567.13 v1@1035,1544.72
NetC4_2: C4.2 J16.7 S1.4 U2.7 | length 1540.2
  Top Layer w10: S1.4@725.75,1560.51 798.74,1487.52 U2.7 1098.77,1488.3 1152.04,1488.3 v1(1155,1491.26) ; v1(1520,1725) 1741.56,1725 1767.54,1750.98 1774.72,1750.98 1775,1751.26 1885,1751.26 J16.7
  Bottom Layer w10: C4.2 1111.5,1491.26 v1(1155,1491.26) 1286.26,1491.26 v1(1520,1725)
NetD1_1: D1.1 J4.1 J5.1 R2.1 TP1.1 U1.7 | length 1080.1
  Top Layer w10: TP1.1@228.74,1102.52 TP1.1@228.74,1142.52 ; TP1.1 TP1.1@228.74,1142.52 ; U1.7 422.91,1913.86 v1(360,1913.86) D1.1 228.74,1854.53 J5.1 J4.1 TP1.1@228.74,1142.52
  Bottom Layer w10: R2.1 311.81,1913.86 v1(360,1913.86)
NetD1_2: D1.2 J4.2 J5.2 J20.1 TP2.1 U1.6 | length 1395.1
  Top Layer w10: J20.1 50,1831.26 150,1731.26 J5.2 ; TP2.1@150,1111.26 J4.2 J5.2 ; U1.6 330,1956.26 297.6,1988.66 D1.2 277.4,1988.66 160,1871.26 160,1659.25 J5.2
NetD2_1: D2.1 R4.1 | length 76.8
  Top Layer w10: D2.1@2341.42,1097.76 R4.1
  Top Layer w20: D2.1 D2.1@2341.42,1097.76
NetD3_1: D3.1 R19.2 | length 117.2
  Top Layer w10: R19.2 D3.1
NetD4_1: D4.1 R21.2 | length 117.2
  Top Layer w10: R21.2 D4.1
NetD5_1: D5.1 R23.2 | length 117.2
  Top Layer w10: R23.2 D5.1
NetD6_1: D6.1 R24.2 | length 119.2
  Top Layer w10: R24.2 410,1661.26 D6.1
NetJ2_1: J2.1 R14.2 U2.34 | length 1010.9
  Top Layer w10: R14.2 J2.1@1338.5,748.74 ; J2.1 1351.85,731.26 1430,731.26 1536.72,837.98 1536.72,1097.98 1600,1161.26 1600,1309.99 1580.73,1329.26 1553.44,1329.26 U2.34@1555,1330.82 ; U2.34@1509.22,1329.26 1510,1330.04 U2.34 U2.34@1535,1329.26
NetJ2_2: J2.2 U2.35 | length 720.8
  Top Layer w10: J2.2 1429.22,818.86 1518.72,908.36 1518.72,1135.06 1519,1135.34 1519,1270.09 1480,1309.09 1480,1341.03 1487.91,1348.94 1535,1348.94 U2.35
NetJ3_1: J3.1 R13.2 U2.36 | length 1076.9
  Top Layer w10: U2.36@1541.56,1370.19 1541.56,1368.63 1572.36,1368.63 1795,1145.99 v1(1795,1061.26) ; R13.2 1657.99,592.76 J3.1 1666.73,751.26 v1(1795,751.26)
  Bottom Layer w10: v1(1795,751.26) v1(1795,1061.26)
NetJ3_2: J3.2 U2.37 | length 834.1
  Top Layer w10: U2.37@1540,1389.87 U2.37@1541.56,1388.31 ; U2.37@1545,1389.87 1576.57,1389.87 1834,1132.44 1834,908.26 1747,821.26 J3.2
NetJ6_1: J6.1 R12.2 U2.38 | length 979.6
  Top Layer w10: U2.38@1534.22,1409.56 U2.38 ; U2.38@1555,1409.56 1582.34,1409.56 1852,1139.9 1852,794.26 1903.74,742.52 J6.1
  Bottom Layer w10: v1(1870,770) 1885,755 R12.2
NetJ6_2: J6.2 U2.39 | length 884.1
  Top Layer w10: U2.39 1588.89,1428.46 1870,1147.36 1870,861.26 1910,821.26 J6.2
NetJ7_3: J7.3 U2.25 | length 1561.1
  Top Layer w10: J7.3 145.01,670 181.27,706.26 181.27,762.07 525.46,1106.26 839.09,1106.26 862.07,1129.24 1264.21,1129.24 1325.56,1190.59 U2.25@1325.56,1237.76
NetJ7_4: J7.4 U2.24 | length 1472.7
  Top Layer w10: J7.4 142.48,748.74 520,1126.26 830.46,1126.26 851.44,1147.24 1256.76,1147.24 1305.87,1196.36 U2.24@1305.87,1237.76
NetJ7_5: J7.5 U2.23 | length 1419.1
  Top Layer w10: J7.5 191.22,827.48 510,1146.26 825,1146.26 843.98,1165.24 1249.3,1165.24 1286.19,1202.13 1286.19,1238.71 U2.23
NetJ10_2: J10.2 U2.40 | length 1253.5
  Top Layer w10: U2.40 1535.78,1448.93 1787.33,1448.93 1900,1336.26 2465,1336.26 2596.57,1467.83 J10.2
NetJ11_2: J11.2 U2.42 | length 859
  Top Layer w10: U2.42 1535.78,1486.74 1779.52,1486.74 1845,1421.26 2218.74,1421.26 2258.74,1461.26 J11.2
NetJ15_2: J15.2 U2.43 | length 499
  Top Layer w10: U2.43 1879.06,1507.2 1925,1461.26 J15.2
NetJ16_5: J16.5 U2.46 | length 817.5
  Top Layer w10: U2.46 1535.78,1567.04 1665.85,1567.04 1795.8,1696.98 2030.73,1696.98 J16.5
NetJ16_6: J16.6 U2.49 | length 742.8
  Top Layer w10: U2.49 1745.24,1676.5 1783.72,1714.98 1948.73,1714.98 J16.6
NetJ18_3: J18.3 U2.28 | length 1160.1
  Top Layer w10: J18.3@499.31,670.57 903.98,1075.24 1286.58,1075.24 1384.61,1173.28 1384.61,1238.71 U2.28
NetJ18_4: J18.4 U2.27 | length 1199.4
  Top Layer w10: J18.4 531.26,747.52 876.98,1093.24 1279.13,1093.24 1364.93,1179.05 1364.93,1238.71 U2.27
NetJ18_5: J18.5 U2.26 | length 1143.8
  Top Layer w10: J18.5 584.54,826.26 869.53,1111.24 1271.67,1111.24 1345.24,1184.82 1345.24,1238.71 U2.26
NetJ20_2: J20.2 R2.2 | length 260.7
  Bottom Layer w10: J20.2 70,1986.26 R2.2
NetR1_1: R1.1 U1.8 | length 110.9
  Top Layer w10: U1.8 v1(495,1856.26)
  Bottom Layer w10: R1.1 453.5,1856.26 v1(495,1856.26)
NetR3_1: R3.1 U2.6 | length 270.1
  Top Layer w10: R3.1 937.56,1507.2 U2.6
NetU1_1: U1.1 U2.62 | length 690
  Top Layer w10: U1.1 726.81,1748.94 1180.74,1748.94 1207.45,1722.23 1207.45,1676.5 U2.62
NetU1_4: U1.4 U2.61 | length 774.7
  Top Layer w10: U1.4 675,2006.26 906.13,1775.13 1180,1775.13 1227.13,1728 1227.13,1677.28 U2.61
UART_RTS: J16.4 TP10.1 U2.54 | length 941
  Top Layer w10: U2.54 1366.49,1677.28 1366.49,1722.23 1447.8,1803.53 1577.28,1803.53 1670,1896.26 1830,1896.26 J16.4 1920,2211.26 TP10.1
UART_RX: J16.3 TP9.1 U2.52 | length 1045.2
  Top Layer w10: U2.52 1405.86,1676.5 1405.86,1722.23 1469.17,1785.53 1882.25,1785.53 1970,1873.29 1970,1936.26 J16.3 2020,2196.26 TP9.1
UART_TX: J16.2 TP8.1 U2.51 | length 1146.8
  Top Layer w10: U2.51@1425.54,1691.26 1425.54,1713.85 1436.62,1724.93 1471.96,1724.93 1502.4,1694.5 1736.51,1694.5 1775,1732.98 1929.7,1732.98 2064.53,1867.82 2064.53,1930.79 J16.2 2120,2156.26 TP8.1
pads on no net: H1.0 H2.0 H3.0 H4.0 J1.3 J1.4 J2.4 J2.5 J3.4 J3.5 J4.4 J4.5 J5.4 J5.5 J6.4 J6.5 J7.6 J7.7 J8.3 J8.4 J9.3 J9.4 J10.4 J10.5 J11.4 J11.5 J12.3 J12.4 J13.3 J13.4 J14.3 J14.4 J15.4 J15.5 J17.3 J17.4 J18.6 J18.7 J19.3 J19.4 S1.2 S1.3 U1.5 U2.2 U2.3 U2.4 U2.16 U2.17 U2.20 U2.21 U2.22 U2.29 U2.41 U2.50 U2.53 U2.57 U2.60 Y1.4

## Polygon pours and split planes (outlines as drawn)
+5V0 on Top Layer "gnd-top-vr" (solid, remove dead copper, pour order 4): 2350,519.77 2225,519.77 2225,629.77 2350,629.77
GND on Top Layer "gnd-top-vr" (solid, remove dead copper, pour order 3): 2225,960 2370,960 2370,735 2225,735
+3V3 on Top Layer "top-3v3" (solid, pour order 1): 2400.51,1063.86 2405.51,1063.86 2930.51,1063.86 2930.51,303.86 2915.51,303.86 2390.51,303.86
+3V3 on Bottom Layer "Bottom Layer-+3V3" (solid, pour order 0): 2400.51,1063.86 2390.56,1053.9 2390.56,307.42 2926.95,307.42 2930.51,303.86 2930.51,1063.86
GND on Bottom Layer "GND" (solid, remove dead copper, pour order 2): -140,2370 2960,2370 2960,-10 -140,-10

## Silkscreen, mask and mechanical layers (free items; w line width, h text height)
Top Overlay:
  text "Arm Board rev 2.0" at 300,30 h60
  text "Mars Rover 2019" at 300,-50 h50

## Text inside footprints (layer, text, board x,y; h text height)
J16: Top Overlay "TX" at 2109.76,2110.35 h40 r270; Top Overlay "RX" at 2007.4,2110.35 h40 r270; Top Overlay "RTS" at 1901.1,2138.98 h40 r270; Top Overlay "IO" at 2210,1810 h40 r270; Top Overlay "CLK" at 2100,1816.26 h40 r270; Top Overlay "RST" at 2000,1816.26 h40 r270; Top Overlay "VCC" at 2212.13,2141.93 h40 r270; Top Overlay "GND" at 1900,1816.26 h40 r270